# EAGLE board rc-tx-board-V1 (EAGLE 9.1.3)
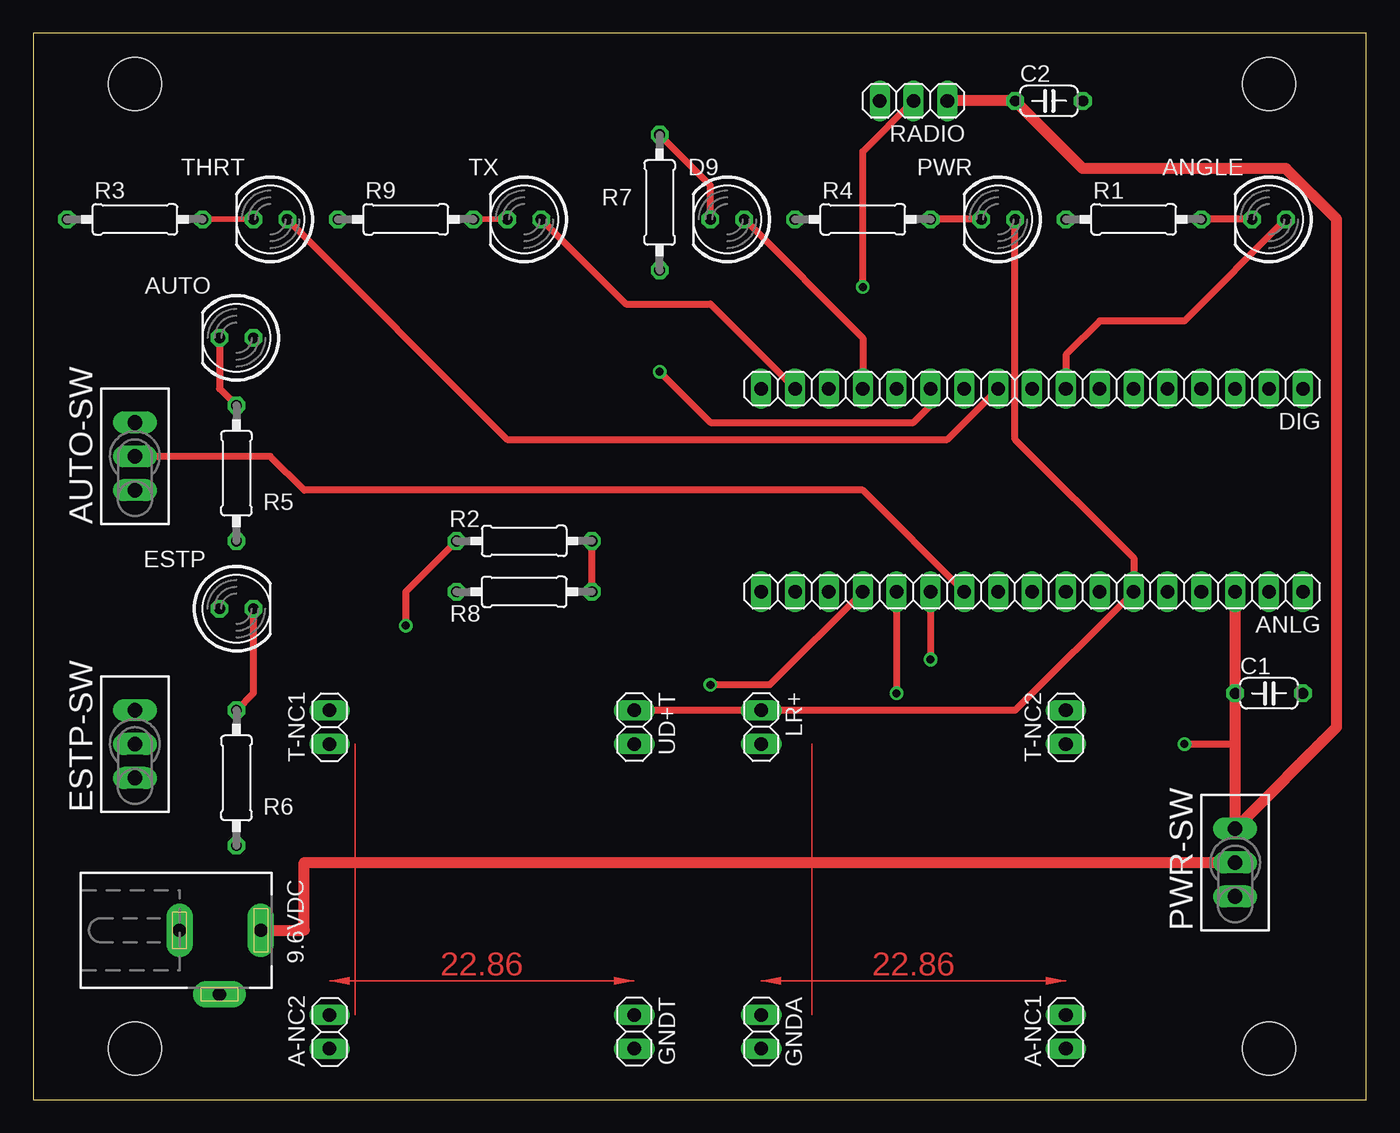
[diagram p0: board, top side]
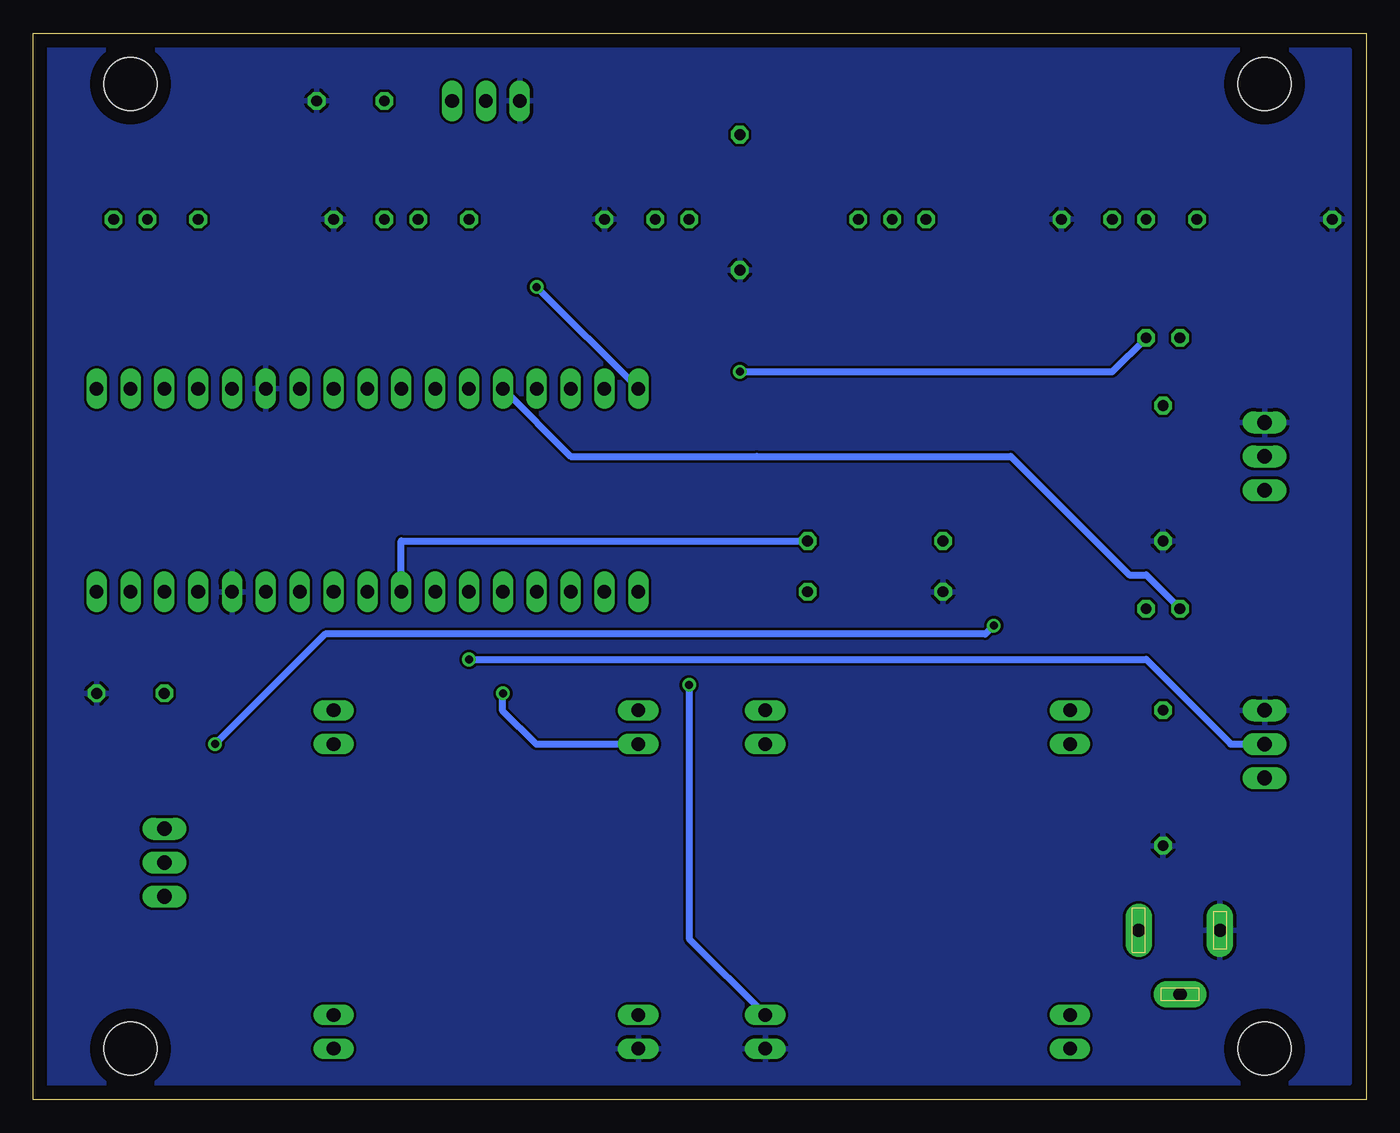
[diagram p1: board, bottom side, seen from below]

Size 100 x 80 mm. Coordinates in mm from the lower left corner, seen from the top.
Outline: 0,0 100,0 100,80 0,80 0,0
Copper layers (1*16): Top 0.035mm / dielectric 1.5mm / Bottom 0.035mm
Design rules "default *": minimum track width 10mil, minimum drill 24mil, track to track 8mil, track to pad 8mil, pad to pad 8mil, via to via 8mil, smd to smd 8mil, copper to edge 40mil, drill to drill 8mil, minimum pad ring 10mil, minimum via ring 8mil, stop-mask expansion 4mil, vias tented up to drill 0mil, thermal gap 10mil
Holes 3.99 mm at 7.62,3.81 92.71,3.81 92.71,76.2 7.62,76.2

## Footprints (pad centres in the part's own frame; a part is rotated, then mirrored left to right if it is on the bottom)
DCJ0202 = drill 1 pad 2 long: 1 0,3.1; 2 4.8,0; 3 0,-3
1X02 = drill 1.016 long: 1 -1.27,0; 2 1.27,0
LED5MM = drill 0.813 octagon: A -1.27,0; K 1.27,0
1X17 = drill 1.016 long: 1 -20.32,0; 2 -17.78,0; 3 -15.24,0; 4 -12.7,0; 5 -10.16,0; 6 -7.62,0; 7 -5.08,0; 8 -2.54,0; 9 0,0; 10 2.54,0; 11 5.08,0; 12 7.62,0; 13 10.16,0; 14 12.7,0; 15 15.24,0; 16 17.78,0; 17 20.32,0
TL3XPO = drill 1.1 pad 1.422 long: 1 -2.54,0; 2 0,0; 3 2.54,0
C050-024X044 = drill 0.813 octagon: 1 -2.54,0; 2 2.54,0
0207/10 = drill 0.813 octagon: 1 -5.08,0; 2 5.08,0
1X03 = drill 1.016 long: 1 -2.54,0; 2 0,0; 3 2.54,0

## Placement (x,y rotation side)
9.6VDC  DCJ0202  [DCJ0202]  13.97,12.7 270 top
A-NC1  [1X02]  77.47,5.08 90 top
A-NC2  [1X02]  22.23,5.08 90 top
ANGLE  [LED5MM]  92.71,66.04 180 top
ANLG  [1X17]  74.93,38.1 180 top
AUTO  [LED5MM]  15.24,57.15 180 top
AUTO-SW  TL36PO  [TL3XPO]  7.62,48.26 90 top
C1  100nF  [C050-024X044]  92.71,30.48 0 top
C2  100nF  [C050-024X044]  76.2,74.93 0 top
D9  [LED5MM]  52.07,66.04 180 top
DIG  [1X17]  74.93,53.34 180 top
ESTP  [LED5MM]  15.24,36.83 0 top
ESTP-SW  TL36PO  [TL3XPO]  7.62,26.67 90 top
GNDA  [1X02]  54.61,5.08 270 top
GNDT  [1X02]  45.09,5.08 270 top
LR+  [1X02]  54.61,27.94 270 top
PWR  [LED5MM]  72.39,66.04 180 top
PWR-SW  TL36PO  [TL3XPO]  90.17,17.78 90 top
R1  1k  [0207/10]  82.55,66.04 0 top
R2  22k  [0207/10]  36.83,41.91 180 top
R3  1k  [0207/10]  7.62,66.04 0 top
R4  1k  [0207/10]  62.23,66.04 0 top
R5  1k  [0207/10]  15.24,46.99 90 top
R6  1k  [0207/10]  15.24,24.13 90 top
R7  1k  [0207/10]  46.99,67.31 90 top
R8  10k  [0207/10]  36.83,38.1 0 top
R9  1k  [0207/10]  27.94,66.04 0 top
RADIO  [1X03]  66.04,74.93 180 top
T-NC1  [1X02]  22.23,27.94 90 top
T-NC2  [1X02]  77.47,27.94 90 top
THRT  [LED5MM]  17.78,66.04 180 top
TX  [LED5MM]  36.83,66.04 180 top
UD+T  [1X02]  45.09,27.94 270 top

## Library data of the parts
9.6VDC = con-jack; OC_FARNELL: unknown; OC_NEWARK: unknown
A-NC1 A-NC2 ANLG DIG GNDA GNDT LR+ RADIO T-NC1 T-NC2 UD+T = pinhead
ANGLE AUTO D9 ESTP PWR THRT TX = led
AUTO-SW ESTP-SW PWR-SW = switch
C1 C2 = resistor
R1-R9 = rcl

## Nets
5V: ANLG.6 LR+.1 PWR.A UD+T.1
9.6V: ANLG.3 C1.1 C2.1 PWR-SW.3 R2.2 RADIO.1
9.6V_SOURCE: 9.6VDC.1 PWR-SW.2
ANGLE: ANGLE.A DIG.8
ANGLE_R: ANGLE.K R1.2
ANGLE_SENS: ANLG.13 LR+.2
AUTO: AUTO.A DIG.12
AUTO_R: AUTO.K R5.2
AUTO_SW: ANLG.11 AUTO-SW.2
BAT_HEALTH: ANLG.10 R2.1 R8.2
ESTP: DIG.13 ESTP.A
ESTP_R: ESTP.K R6.2
ESTP_SW: ANLG.12 ESTP-SW.2
GND: 9.6VDC.3 ANLG.5 AUTO-SW.3 C1.2 C2.2 DIG.6 ESTP-SW.3 GNDA.2 GNDT.2 R1.1 R3.1 R4.1 R5.1 R6.1 R7.1 R8.1 R9.1 RADIO.3
PWR_R: PWR.K R4.2
RADIO_SIG: DIG.17 RADIO.2
SPARE: D9.A DIG.14
SPARE_R: D9.K R7.2
THROTTLE_SENS: ANLG.14 GNDT.1
THRT: DIG.10 THRT.A
THRT_R: R3.2 THRT.K
TX: DIG.16 TX.A
TX_R: R9.2 TX.K

## Tracks (layer width: path | path; a pad name or v marks a point on that pad's centre or on a via)
5V
  Top 0.508: PWR.A 73.66,49.53 82.55,40.64 ANLG.6 73.66,29.21 LR+.1 UD+T.1
9.6V  (via drill 0.61)
  Top 0.508: R2.2 27.94,38.1 v27.94,35.56 | v86.36,26.67 90.17,26.67
  Top 0.813: ANLG.3 C1.1 90.17,26.67 PWR-SW.3 97.79,27.94 97.79,66.04 93.98,69.85 78.74,69.85 C2.1 RADIO.1
  Bottom 0.508: v27.94,35.56 28.57,34.92 78.11,34.92 v86.36,26.67
9.6V_SOURCE
  Top 0.813: 9.6VDC.1 20.32,12.7 20.32,17.78 PWR-SW.2
ANGLE
  Top 0.508: ANGLE.A 86.36,58.42 80.01,58.42 77.47,55.88 DIG.8
ANGLE_R
  Top 0.508: ANGLE.K R1.2
ANGLE_SENS  (via drill 0.61)
  Top 0.508: ANLG.13 v64.77,30.48
  Bottom 0.508: LR+.2 62.28,26.67 64.82,29.21 64.82,30.43 v64.77,30.48
AUTO  (via drill 0.61)
  Top 0.508: v46.99,54.61 50.8,50.8 66.04,50.8 67.31,52.07 DIG.12
  Bottom 0.508: v46.99,54.61 19.05,54.61 AUTO.A
AUTO_R
  Top 0.508: AUTO.K 13.97,53.34 R5.2
AUTO_SW
  Top 0.508: AUTO-SW.2 17.78,48.26 20.32,45.72 62.23,45.72 ANLG.11
BAT_HEALTH
  Top 0.508: R8.2 R2.1
  Bottom 0.508: ANLG.10 72.39,41.91 R2.1
ESTP
  Bottom 0.508: ESTP.A 16.51,39.37 17.78,39.37 26.67,48.26 45.72,48.26 59.69,48.26 DIG.13
ESTP_R
  Top 0.508: ESTP.K 16.51,30.48 R6.2
ESTP_SW  (via drill 0.61)
  Top 0.508: ANLG.12 v67.31,33.02
  Bottom 0.508: v67.31,33.02 16.51,33.02 10.16,26.67 ESTP-SW.2
GND
  pour Bottom: 1.27,78.74 99.06,78.74 99.06,1.27 1.27,1.27
PWR_R
  Top 0.508: PWR.K R4.2
RADIO_SIG  (via drill 0.61)
  Top 0.508: v62.23,60.96 62.23,71.12 RADIO.2
  Bottom 0.508: DIG.17 v62.23,60.96
SPARE
  Top 0.508: D9.A 62.23,57.15 DIG.14
SPARE_R
  Top 0.508: D9.K 50.8,68.58 R7.2
THROTTLE_SENS  (via drill 0.61)
  Top 0.508: ANLG.14 55.24,31.11 v50.8,31.11
  Bottom 0.508: v50.8,31.11 50.8,12.06 GNDT.1
THRT
  Top 0.508: THRT.A 35.56,49.53 68.58,49.53 DIG.10
THRT_R
  Top 0.254: 12.8,66.06 R3.2 | 16.46,66.06 THRT.K
  Top 0.406: 16.46,66.06 12.8,66.06
TX
  Top 0.508: TX.A 44.45,59.69 50.8,59.69 DIG.16
TX_R
  Top 0.254: 33.15,66.06 R9.2 | 35.53,66.06 TX.K
  Top 0.406: 35.53,66.06 33.15,66.06
(copper drawn outside any net)
  shapes: Top area x4

## Text on the board
tValues: Elcano Project RC Board 1